# Altium PCB RE.-SYS-final.PcbDoc
Units mm, origin at the board's own origin, x right, y up, seen from the top; angles counter-clockwise.
Board outline 137.54 x 69.6 mm, 2 copper layers (Top Layer, Bottom Layer); 50 components, 40 nets, 282 pads, 0 vias.
Unrouted connection lines stored in the file: 1.
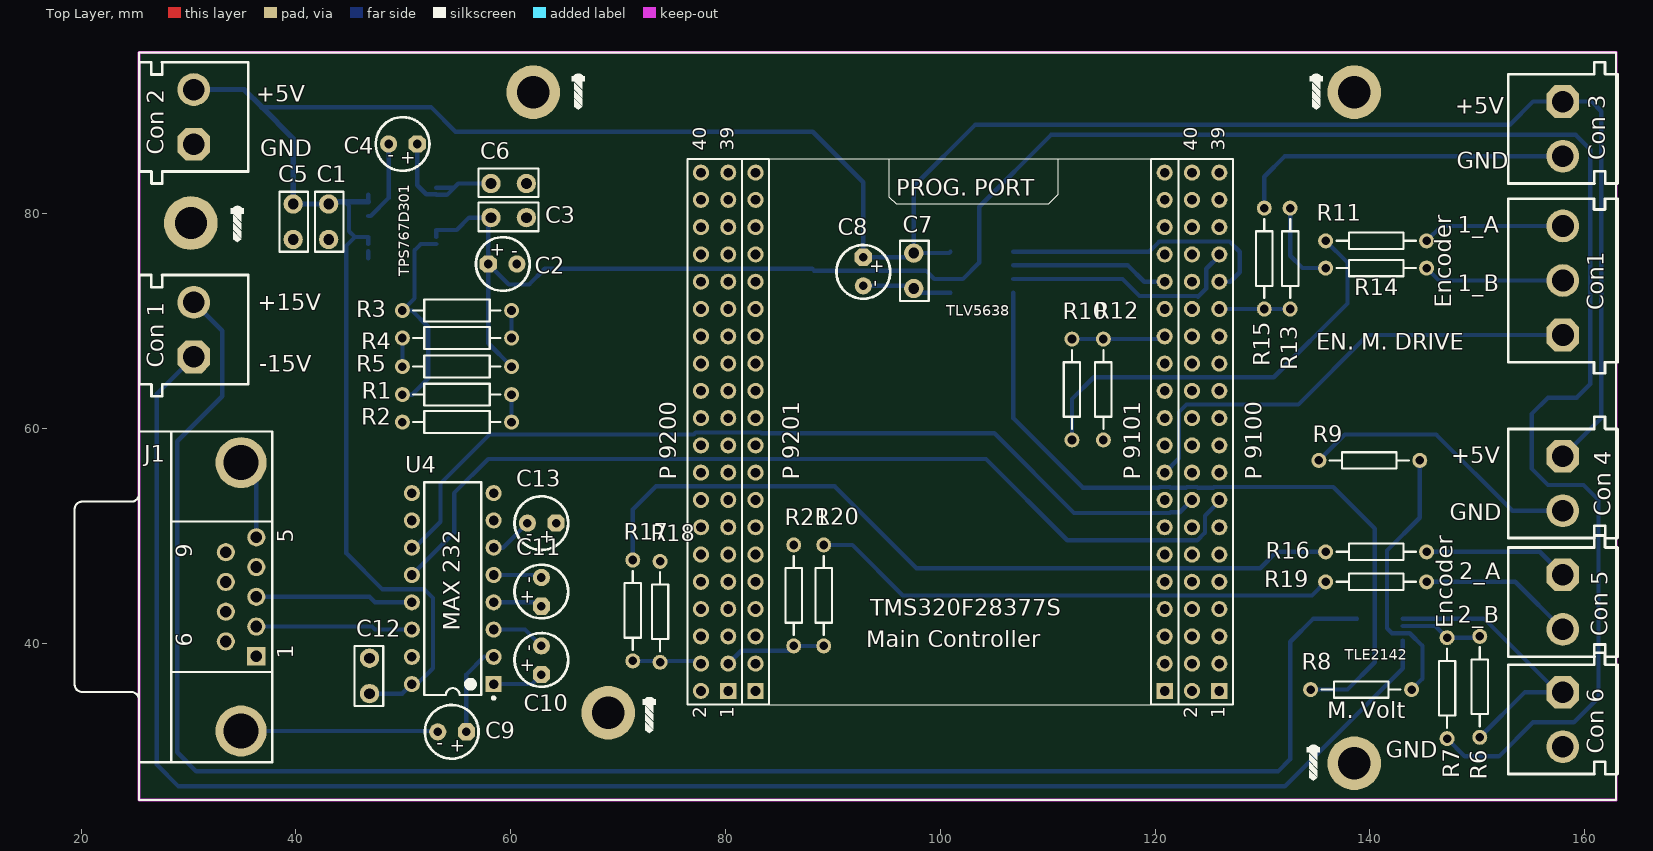
[diagram p0: Top Layer view]
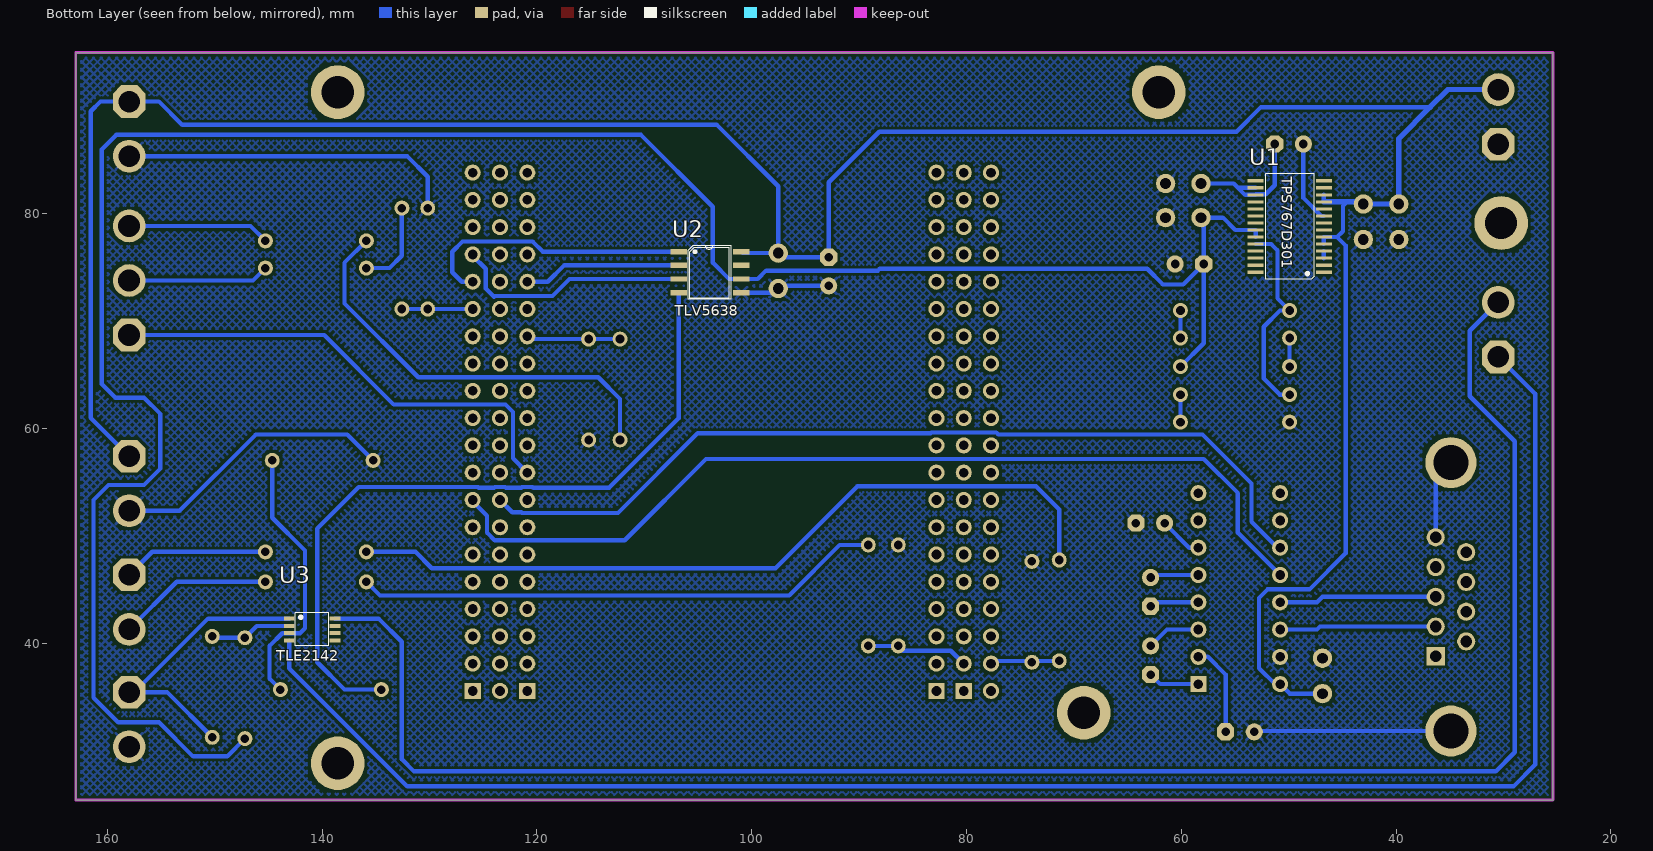
[diagram p1: Bottom Layer view, seen from below]
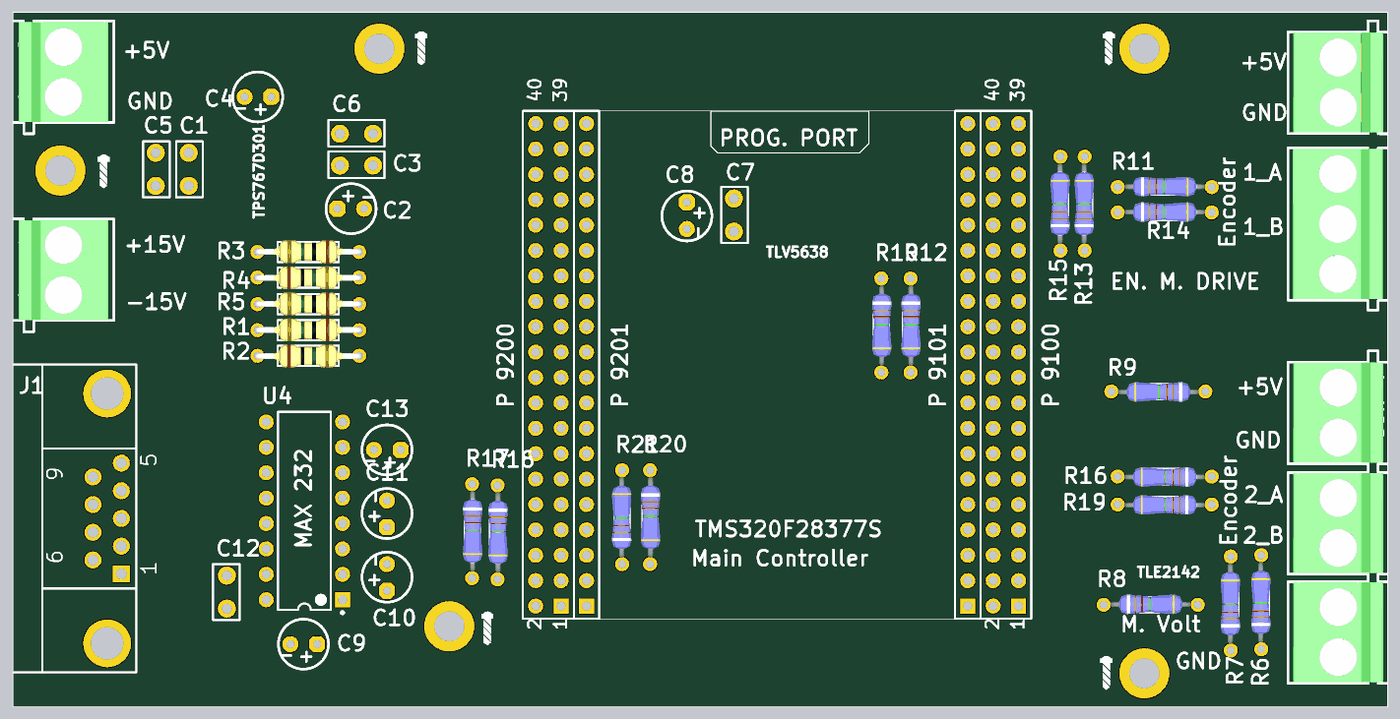
[diagram p2: 3D render of the assembled board from above, using the file's embedded part models]

## Layer stack, top to bottom
Top Layer: signal copper 0.0356
Dielectric: dielectric 0.32, FR-4, Dk 4.8
Bottom Layer: signal copper 0.0356

## Board outline
25.4,25.4 25.4,94.996 162.941,94.996 162.941,25.4

## Design rules (kind name [scope] priority, off if disabled: settings)
Clearance [All] p1: gap=0.25
PolygonConnect [All] p1: connectstyle=Relief reliefconductorwidth=0.254 reliefentries=4 polygonreliefangle="45 Angle" airgapwidth=0.254
RoutingLayers [All] p1: top layer_v5=FALSE bottom layer_v5=TRUE
RoutingVias [All] p1: holewidth=0.711 width=1.27 viastyle="Through Hole" minholewidth=0.711 minwidth=1.27 maxholewidth=0.711 maxwidth=1.27
SolderMaskExpansion [All] p1: expansion=0.102
Width [All] p1: maxlimit=1 minlimit=0.254 preferedwidth=0.254
27 further rules are at their usual default settings.

## Components (designator, comment, footprint, x,y, rotation, side; value= is the part's Value field where it differs from the comment)
C1 "Cap" RAD-0.3 43.053,79.248 r90 top
C2 "Cap" MY_CAP3300U 59.309,75.311 r0 top
C3 "Cap" RAD-0.3 59.817,79.629 r180 top
C4 "Cap" MY_CAP3300U 49.911,86.487 r180 top
C5 "Cap" RAD-0.3 39.751,79.248 r90 top
C6 "Cap" RAD-0.3 59.817,82.804 r180 top
C7 "Cap" RAD-0.3 97.536,74.676 r90 top
C8 "Cap" MY_CAP3300U 92.837,74.549 r270 top
C9 "Cap" MY_CAP3300U 54.483,31.75 r180 top
C10 "Cap" MY_CAP3300U 62.865,38.481 r90 top
C11 "Cap" MY_CAP3300U 62.865,44.846 r90 top
C12 "Cap" RAD-0.3 46.863,36.957 r270 top
C13 "Cap" MY_CAP3300U 62.834,51.181 r180 top
Con1 "CON3 pin Green" My_CN3 152.883,66.167 r90 top
"Con 1" "CON2 pin blue" MY_CN2 25.4,64.135 r90 top
"Con 2" "CON2 pin blue" MY_CN2 25.4,83.947 r90 top
"Con 3" "CON2 pin blue" MY_CN2 163.068,92.964 r270 top
"Con 4" "CON2 pin blue" MY_CN2 163.068,59.944 r270 top
"Con 5" "CON2 pin blue" MY_CN2 163.068,48.895 r270 top
"Con 6" "CON2 pin blue" MY_CN2 163.068,37.973 r270 top
J1 "D Connector 9" DSUB1.385-2H9 25.4,44.323 r90 top
"P 9100" "Header 20X2" HDR2X20 125.984,35.56 r90 top
"P 9101" "Header 20" HDR1X20 120.904,35.56 r90 top
"P 9200" "Header 20X2" HDR2X20 80.264,35.56 r90 top
"P 9201" "Header 20" HDR1X20 82.804,35.56 r90 top
R1 "1k" MY_AXIAL-0.4 55.016,63.163 r0 top
R2 "1k" MY_AXIAL-0.4 54.991,60.579 r180 top
R3 "1k" MY_AXIAL-0.4 55.016,70.993 r0 top
R4 "1k" MY_AXIAL-0.4 54.991,68.409 r180 top
R5 "1k" MY_AXIAL-0.4 55.016,65.773 r0 top
R6 "Res1" AXIAL-0.3 150.241,35.941 r270 top
R7 "Res1" AXIAL-0.3 147.193,35.814 r270 top
R8 "Res1" AXIAL-0.3 139.192,35.687 r180 top
R9 "Res1" AXIAL-0.3 139.954,57.023 r0 top
R10 "Res1" AXIAL-0.3 112.268,63.627 r90 top
R11 "Res1" AXIAL-0.3 140.589,77.47 r180 top
R12 "Res1" AXIAL-0.3 115.189,63.627 r90 top
R13 "Res1" AXIAL-0.3 132.588,75.819 r270 top
R14 "Res1" AXIAL-0.3 140.589,74.93 r180 top
R15 "Res1" AXIAL-0.3 130.175,75.819 r270 top
R16 "Res1" AXIAL-0.3 140.589,48.514 r0 top
R17 "Res1" AXIAL-0.3 71.374,43.053 r90 top
R18 "Res1" AXIAL-0.3 73.914,42.926 r90 top
R19 "Res1" AXIAL-0.3 140.589,45.72 r0 top
R20 "Res1" AXIAL-0.3 89.154,44.45 r90 top
R21 "Res1" AXIAL-0.3 86.36,44.45 r270 top
U1 "TPS767D301" "SMD Reg." 47.625,83.693 r0 bottom
U2 "TLV5638" "SMD IC FP" 105.918,72.009 r180 bottom
U3 "Op-Amp" PCBComponent_1 142.494,39.751 r180 bottom
U4 "MAX232CPE" PE16A 54.61,45.085 r180 top

## Footprints (in the part's own frame and the unit in brackets; to place one, negate y for a bottom-side part, rotate by r counter-clockwise, add the part's x,y. Pads: shape width x height; smd on the part's side, far side on the other; paste and mask are expansions set on the pad)
AXIAL-0.3 [mm]
  round 1.4 hole 0.8: 1(-4.699,0) 2(4.699,0)
  silkscreen extent -3.68,-0.76 3.68,0.76, body extent -4.06,-1.02 4.06,0.93, height 2.51
DSUB1.385-2H9 [mm] "Connector; D Subminiature; 9 Position; Right Angle; Pitch 1.385 mm"
  rect 1.69x1.69 hole 1.09: 1(-5.54,-10.92)
  round 1.69 hole 1.09: 2(-2.77,-10.92) 3(0,-10.92) 4(2.77,-10.92) 5(5.54,-10.92) 6(-4.155,-8.08) 7(-1.385,-8.08) 8(1.385,-8.08) 9(4.155,-8.08)
  round 4.76 hole 3.26: 10(-12.495,-9.5) 11(12.495,-9.5)
  silkscreen extent -15.4,-12.4 15.4,6
HDR1X20 [mm] "Connector; Header; 20 Position"
  rect 1.5x1.5 hole 0.9: 1(0,0)
  round 1.5 hole 0.9: 2(2.54,0) 3(5.08,0) 4(7.62,0) 5(10.16,0) 6(12.7,0) 7(15.24,0) 8(17.78,0) 9(20.32,0) 10(22.86,0) 11(25.4,0) 12(27.94,0) 13(30.48,0) 14(33.02,0) 15(35.56,0) 16(38.1,0) 17(40.64,0) 18(43.18,0) 19(45.72,0) 20(48.26,0)
  silkscreen extent -1.27,-1.27 49.53,1.27
HDR2X20 [mm] "Connector; Header; 20x2 Position"
  rect 1.5x1.5 hole 0.9: 1(0,0)
  round 1.5 hole 0.9: 2(0,2.54) 3(2.54,0) 4(2.54,2.54) 5(5.08,0) 6(5.08,2.54) 7(7.62,0) 8(7.62,2.54) 9(10.16,0) 10(10.16,2.54) 11(12.7,0) 12(12.7,2.54) 13(15.24,0) 14(15.24,2.54) 15(17.78,0) 16(17.78,2.54) 17(20.32,0) 18(20.32,2.54) 19(22.86,0) 20(22.86,2.54) 21(25.4,0) 22(25.4,2.54) 23(27.94,0) 24(27.94,2.54) 25(30.48,0) 26(30.48,2.54) 27(33.02,0) 28(33.02,2.54) 29(35.56,0) 30(35.56,2.54) 31(38.1,0) 32(38.1,2.54) 33(40.64,0) 34(40.64,2.54) 35(43.18,0) 36(43.18,2.54) 37(45.72,0) 38(45.72,2.54) 39(48.26,0) 40(48.26,2.54)
  silkscreen extent -1.27,-1.27 49.53,3.81
MY_AXIAL-0.4 [mm]
  round 1.4 hole 0.8: 1(-5.093,-0.013) 2(5.067,-0.013)
  silkscreen extent -4.08,-1.03 4.05,1, body extent -5.38,-1.14 5.38,1.17, height 2.93
MY_CAP3300U [mm]
  oct 1.6x1.6 hole 0.8: +(-1.397,0)
  round 1.6 hole 0.8: -(1.27,0)
  silkscreen extent -2.53,-2.5 2.47,2.5
MY_CN2 [mil]
  oct 120x120 hole 78.74: 1(99.5,-200.5)
  round 120 hole 78.74: 2(299.5,-200.5)
  silkscreen extent -45,-400 400,0, body extent 1,-379 395,-25, height 534
My_CN3 [mil]
  oct 120x120 hole 80: 1(99.5,-200.5)
  round 120 hole 80: 2(299.5,-200.5) 3(499.5,-200.5)
  silkscreen extent -40,-400 600,0, body extent 5,-374 595,-20, height 534
PCBComponent_1 [mm]
  rect 1x0.38 smd: 1(-0.584,2.54) 2(-0.584,1.863) 3(-0.584,1.185) 4(-0.584,0.508) 5(3.683,0.508) 6(3.683,1.185) 7(3.683,1.863) 8(3.683,2.54)
  silkscreen extent 0,0 3.1,3.1
PE16A [mm] "DIP, 16-Leads, Row Spacing 7.62mm, Pitch 2.54mm, Body 19.18x6.99mm"
  rect 1.5x1.5 hole 0.9: 1(-3.81,8.89)
  round 1.5 hole 0.9: 2(-3.81,6.35) 3(-3.81,3.81) 4(-3.81,1.27) 5(-3.81,-1.27) 6(-3.81,-3.81) 7(-3.81,-6.35) 8(-3.81,-8.89) 9(3.81,-8.89) 10(3.81,-6.35) 11(3.81,-3.81) 12(3.81,-1.27) 13(3.81,1.27) 14(3.81,3.81) 15(3.81,6.35) 16(3.81,8.89)
  silkscreen extent -3.94,-9.9 2.65,10.31, body extent -3.3,-9.9 3.3,9.9, height 5.08
RAD-0.3 [mm]
  round 1.8 hole 1: 1(-1.651,0) 2(1.651,0)
  silkscreen extent -2.79,-1.4 2.79,1.27
"SMD IC FP" [mil]
  rect 60x20.08 smd: 1(-35,175) 2(-35,125) 3(-35,75) 4(-35,25) 5(195,25) 6(195,75) 7(195,125) 8(195,175)
  silkscreen extent 0,0 157,197
"SMD Reg." [mm]
  rect 1.5x0.3 smd: 1(-0.889,9.144) 2(-0.889,8.489) 3(-0.889,7.835) 4(-0.889,7.18) 5(-0.889,6.526) 6(-0.889,5.871) 7(-0.889,5.217) 8(-0.889,4.562) 9(-0.889,3.908) 10(-0.889,3.253) 11(-0.889,2.599) 12(-0.889,1.944) 13(-0.889,1.29) 14(-0.889,0.635) 15(5.461,0.635) 16(5.461,1.29) 17(5.461,1.29) 18(5.461,1.944) 19(5.461,2.599) 20(5.461,3.253) 21(5.461,3.908) 22(5.461,4.562) 23(5.461,5.217) 24(5.461,5.871) 25(5.461,6.526) 26(5.461,7.18) 27(5.461,7.18) 28(5.461,7.835) 29(5.461,8.489) 30(5.461,9.144)
  silkscreen extent 0,0 4.5,9.8

## Part data
C1 C3 C5 C6 C7 C12: "Capacitor"
C2 C4 C8 C9 C10 C11 C13: library part "Cap Pol", "CAP-3300Uf"
Con1: "Connector green screw"
"Con 1" "Con 2" "Con 3" "Con 4" "Con 5" "Con 6": "Connector blue screw"
J1: "Receptacle Assembly, 9 Position, Right Angle"
"P 9100" "P 9200": "Header, 20-Pin, Dual row"
"P 9101" "P 9201": "Header, 20-Pin"
R1 R2 R3 R4 R5: library part Res, "resistor 1/4 wat"
R6 R7 R8 R9 R10 R11 R12 R13 R14 R15 R16 R17 R18 R19 R20 R21: "Resistor"
U1: library part "SMD Reg.", "Power Reg SMD IC"
U2: library part "SMD IC", "DAC"
U3: library part SMD_Comp., "OP-AMP"
U4: "+5V Powered RS-232 Driver/Receiver"

## Free pads (board coordinates)
  round 5 hole 3: 0(30.226,79.121) 1(30.226,79.121) 2(138.557,28.829) 3(138.557,91.313) 4(69.088,33.528) 5(62.103,91.313)

## Nets (pads, with @x,y where several pads share a name; then routed paths per layer and width w, separated by ;. In a path a pad name is that pad's centre, name@x,y a point inside that pad or via, vN(x,y) a via of type N, cw(c..) or ccw(c..) an arc to the next point about the centre after c; other vN are vias at no path point)
"ENABLE MOTOR DRIVER": "P 9101.9" Con1.1 | length 44.9
  Bottom Layer w0.4: 120.904,55.88 122.24,57.216 122.24,61.534 122.936,62.23 133.35,62.23 139.814,68.694 Con1.1
"ENCODER 1A": Con1.3 R11.1 | length 13.3
  Bottom Layer w0.4: R11.1 146.672,78.854 Con1.3
"ENCODER 1B": Con1.2 R14.1 | length 13.2
  Bottom Layer w0.4: R14.1 146.444,73.774 Con1.2
"ENCODER 2A": "Con 5.1" R16.2 | length 13.6
  Bottom Layer w0.4: R16.2 155.829,48.514 157.975,46.368
"ENCODER 2B": "Con 5.2" R19.2 | length 14.5
  Bottom Layer w0.4: R19.2 153.543,45.72 157.975,41.288
GND: "Con 2.1" "Con 3.2" "Con 4.2" "Con 6.2" C1.1 C2.- C3.1 C4.- C5.1 C6.1 C7.1 C8.- C9.- C12.1 C13.+ J1.5 J1.10 J1.11 R2.2 R9.1 R12.1 R15.1 R18.2 R21.1 U1.3 U1.4 U1.9 U1.10 U2.5 U4.15 | length 100.7
  Bottom Layer w0.4: J1.10 53.135,31.828 C9.- ; J1.11 36.32,55.398 J1.5 ; U1.3 U1.4 ; U1.9 46.969,79.785 48.641,81.457 C4.- ; C8.- 97.282,73.279 C7.1 97.917,72.644 U2.5 ; R15.1 130.175,83.439 132.093,85.357 157.975,85.357 ; R9.1 137.668,59.436 146.177,59.436 153.276,52.337 157.975,52.337
"MOTOR VOLTAGE": "Con 6.1" R6.2 U3.1 | length 26.7
  Bottom Layer w0.4: U3.1 150.622,42.291 157.467,35.446 ; R6.2 154.445,35.446 157.467,35.446 ; 157.975,35.446 157.467,35.446
NetC4_+: C4.+ C6.2 U1.17 U1.18 | length 13.1
  Bottom Layer w0.4: C4.+ 51.308,82.639 52.148,81.799 U1.18@53.086,81.799 ; U1.18 54.063,81.749 54.717,82.403 ; U1.17 54.717,82.403 ; C6.2 55.118,82.804 54.717,82.403
NetC9_+: C9.+ U4.2 | length 8.6
  Bottom Layer w0.4: C9.+ 55.88,37.084 57.531,38.735 U4.2
NetC10_+: C10.+ U4.1 | length 4.8
  Bottom Layer w0.4: U4.1 61.976,36.195 C10.+
NetC10_-: C10.- U4.3 | length 5.1
  Bottom Layer w0.4: U4.3 61.341,41.275 C10.-
NetC11_+: C11.+ U4.4 | length 4.6
  Bottom Layer w0.4: U4.4 62.499,43.815 C11.+
NetC11_-: C11.- U4.5 | length 4.5
  Bottom Layer w0.4: U4.5 62.626,46.355 C11.-
NetC13_-: C13.- U4.6 | length 4.1
  Bottom Layer w0.4: U4.6 59.278,48.895 C13.-
NetJ1_2: J1.2 U4.14 | length 14.6
  Bottom Layer w0.4: J1.2 47.093,41.553 47.371,41.275 U4.14
NetJ1_3: J1.3 U4.13 | length 14.7
  Bottom Layer w0.4: J1.3 46.863,44.323 47.371,43.815 U4.13
"NetP 9100_15": "P 9100.15" U4.12 | length 87.5
  Bottom Layer w0.4: U4.12 54.737,50.292 54.737,53.975 57.912,57.15 104.267,57.15 111.821,49.596 123.943,49.596 124.648,50.301 124.648,51.872 125.984,53.208 125.984,53.34
"NetP 9100_16": "P 9100.16" U4.11 | length 82.8
  Bottom Layer w0.4: U4.11 51.054,48.895 53.467,51.308 53.467,54.864 58.041,59.438 77.039,59.438 77.225,59.624 83.303,59.624 83.364,59.563 105.029,59.563 112.456,52.136 121.403,52.136 121.464,52.197 122.301,52.197 123.444,53.34
"NetP 9100_29": "P 9100.29" R13.2 R15.2 | length 6.6
  Bottom Layer w0.4: 125.984,71.12 R15.2 R13.2
"NetP 9100_31": "P 9100.31" U2.1 | length 26
  Bottom Layer w0.4: U2.1 119.455,76.454 120.405,77.404 126.934,77.404 127.889,76.449 127.889,74.549 127,73.66 125.984,73.66
"NetP 9100_33": "P 9100.33" U2.3 | length 22.6
  Bottom Layer w0.4: U2.3 116.967,73.914 118.557,72.324 123.943,72.324 124.004,72.263 124.78,73.039 124.78,74.864 125.984,76.068 125.984,76.2
"NetP 9101_14": "P 9101.14" R10.2 R12.2 | length 8.7
  Bottom Layer w0.4: R10.2 R12.2 120.65,68.326 120.904,68.58
"NetP 9101_16": "P 9101.16" U2.2 | length 14.7
  Bottom Layer w0.4: U2.2 117.475,75.184 118.999,73.66 120.904,73.66
"NetP 9200_3": "P 9200.3" R20.1 R21.2 | length 9.6
  Bottom Layer w0.4: 80.264,38.1 81.468,39.304 85.913,39.304 R21.2 R20.1
"NetP 9200_4": "P 9200.4" R17.1 R18.1 | length 6.5
  Bottom Layer w0.4: R17.1 77.47,38.354 77.724,38.1
NetR1_1: R1.1 R3.1 U1.25 | length 19.2
  Bottom Layer w0.4: R1.1 50.832,63.151 52.324,64.643 52.324,69.469 50.813,70.98 R3.1 51.054,72.111 51.054,76.581 51.64,77.167 U1.25
NetR1_2: R1.2 R2.1 | length 2.6
  Bottom Layer w0.4: R2.1 R1.2
NetR3_2: R3.2 R4.1 | length 2.6
  Bottom Layer w0.4: R4.1 R3.2
NetR4_2: R4.2 R5.1 | length 2.7
  Bottom Layer w0.4: R5.1 R4.2
NetR6_1: R6.1 R7.1 U3.2 | length 7.7
  Bottom Layer w0.4: U3.2 146.092,41.614 R7.1 150.114,40.513 R6.1
NetR8_1: R8.1 R9.2 U3.3 | length 25.4
  Bottom Layer w0.4: R8.1 144.907,36.703 144.907,39.757 143.727,40.936 U3.3 142.071,40.936 141.605,41.402 141.605,48.641 144.653,51.689 R9.2
NetR8_2: R8.2 U2.4 | length 69.2
  Bottom Layer w0.4: U2.4 106.807,60.96 113.284,54.483 120.344,54.483 120.405,54.544 121.403,54.544 121.464,54.483 122.884,54.483 122.945,54.544 123.943,54.544 124.004,54.483 125.424,54.483 125.485,54.544 136.591,54.544 140.462,50.673 140.462,38.227 137.922,35.687 R8.2
NetR10_1: R10.1 R11.2 | length 39.8
  Bottom Layer w0.4: R10.1 112.268,62.738 114.3,64.77 131.064,64.77 137.922,71.628 137.922,75.438 R11.2
NetR13_1: R13.1 R14.2 | length 8.2
  Bottom Layer w0.4: R13.1 132.588,76.073 133.731,74.93 R14.2
NetR16_1: R16.1 R17.2 | length 73.9
  Bottom Layer w0.4: R17.2 71.374,52.451 73.533,54.61 90.17,54.61 97.79,46.99 129.794,46.99 131.318,48.514 R16.1
NetR19_1: R19.1 R20.2 | length 49.2
  Bottom Layer w0.4: R20.2 91.821,49.149 96.52,44.45 134.62,44.45 R19.1
"VCC +1.9 V": C2.+ C3.2 R5.2 R7.2 U1.23 U1.24 U2.6 | length 211.1
  Bottom Layer w0.4: U1.24 U1.23 53.096,78.486 54.991,78.486 56.134,79.629 C3.2 57.912,79.375 C2.+ ; R5.2 57.912,67.932 C2.+ ; R7.2 148.844,29.464 152.019,29.464 155.194,32.639 159.004,32.639 161.29,34.925 161.29,53.34 159.893,54.737 156.591,54.737 155.067,56.261 155.067,61.341 156.591,62.865 159.258,62.865 160.528,64.135 160.528,85.979 159.172,87.335 110.322,87.335 103.632,80.645 103.632,75.438 102.108,73.914 U2.6 99.441,73.914 98.663,74.692 88.249,74.692 88.077,74.864 63.18,74.864 61.722,73.406 59.817,73.406 C2.+
"VCC +5 V": "Con 2.2" "Con 3.1" "Con 4.1" C1.2 C5.2 C7.2 C8.+ C12.2 U1.5 U1.6 U1.11 U1.12 U2.8 U4.16 | length 264.9
  Bottom Layer w0.4: 36.83,89.916 52.578,89.916 54.864,87.63 88.138,87.63 92.837,82.931 C8.+ 97.155,75.946 C7.2 ; 44.577,81.094 44.958,80.713 44.958,78.359 45.495,77.822 ; U1.5 U1.6 45.495,77.822 ; U1.11 U1.12 ; C12.2 49.911,35.306 U4.16 51.282,36.195 52.766,37.679 52.766,44.221 51.972,45.015 48.076,45.015 44.704,48.387 44.704,77.03 45.495,77.822 ; U2.8 100.838,76.327 C7.2 ; 157.975,57.417 161.544,60.985 161.544,89.535 160.642,90.437 157.975,90.437 155.207,90.437 153.035,88.265 103.251,88.265 97.536,82.55 C7.2
  Bottom Layer w0.5: 30.493,91.554 35.192,91.554 36.83,89.916 39.751,86.995 C5.2 C1.2 ; C1.2@43.248,81.094 44.577,81.094 U1.11
"VCC +15 V": "Con 1.2" U3.8 | length 167.6
  Bottom Layer w0.4: 30.493,71.742 33.147,69.088 33.147,62.992 28.956,58.801 28.956,29.845 30.734,28.067 131.445,28.067 132.588,29.21 132.588,40.132 134.747,42.291 U3.8
"VEE -15 V": "Con 1.1" U3.4 | length 163.4
  Bottom Layer w0.4: 30.493,66.662 27.051,63.221 27.051,28.702 29.083,26.67 132.08,26.67 143.078,37.668 U3.4
pads on no net: "P 9100.1" "P 9100.2" "P 9100.3" "P 9100.4" "P 9100.5" "P 9100.6" "P 9100.7" "P 9100.8" "P 9100.9" "P 9100.10" "P 9100.11" "P 9100.12" "P 9100.13" "P 9100.14" "P 9100.17" "P 9100.18" "P 9100.19" "P 9100.20" "P 9100.21" "P 9100.22" "P 9100.23" "P 9100.24" "P 9100.25" "P 9100.26" "P 9100.27" "P 9100.28" "P 9100.30" "P 9100.32" "P 9100.34" "P 9100.35" "P 9100.36" "P 9100.37" "P 9100.38" "P 9100.39" "P 9100.40" "P 9101.1" "P 9101.2" "P 9101.3" "P 9101.4" "P 9101.5" "P 9101.6" "P 9101.7" "P 9101.8" "P 9101.10" "P 9101.11" "P 9101.12" "P 9101.13" "P 9101.15" "P 9101.17" "P 9101.18" "P 9101.19" "P 9101.20" "P 9200.1" "P 9200.2" "P 9200.5" "P 9200.6" "P 9200.7" "P 9200.8" "P 9200.9" "P 9200.10" "P 9200.11" "P 9200.12" "P 9200.13" "P 9200.14" "P 9200.15" "P 9200.16" "P 9200.17" "P 9200.18" "P 9200.19" "P 9200.20" "P 9200.21" "P 9200.22" "P 9200.23" "P 9200.24" "P 9200.25" "P 9200.26" "P 9200.27" "P 9200.28" "P 9200.29" "P 9200.30" "P 9200.31" "P 9200.32" "P 9200.33" "P 9200.34" "P 9200.35" "P 9200.36" "P 9200.37" "P 9200.38" "P 9200.39" "P 9200.40" "P 9201.1" "P 9201.2" "P 9201.3" "P 9201.4" "P 9201.5" "P 9201.6" "P 9201.7" "P 9201.8" "P 9201.9" "P 9201.10" "P 9201.11" "P 9201.12" "P 9201.13" "P 9201.14" "P 9201.15" "P 9201.16" "P 9201.17" "P 9201.18" "P 9201.19" "P 9201.20" J1.1 J1.4 J1.6 J1.7 J1.8 J1.9 U1.1 U1.2 U1.7 U1.8 U1.13 U1.14 U1.15 U1.16 U1.19 U1.20 U1.21 U1.22 U1.26 U1.27 U1.28 U1.29 U1.30 U2.7 U3.5 U3.6 U3.7 U4.7 U4.8 U4.9 U4.10

## Polygon pours and split planes (outlines as drawn)
GND on Bottom Layer "Bottom Layer-No Net" (hatched 45Degree grid 0.508 track 0.203, remove dead copper, pour order 2): 25.4,94.996 162.941,94.996 162.941,25.4 25.4,25.4

## Keep-outs
Keep-Out Layer:
  the board outline again, w0.254

## Silkscreen, mask and mechanical layers (free items; w line width, h text height)
Top Overlay:
  region: 135.611,92.329 134.391,92.329 134.391,92.812 135.611,92.812
  region: 135.001,89.662 135.382,89.941 134.62,90.678 134.62,89.941
  region: 135.382,91.567 135.382,92.456 134.62,92.456 134.62,92.329
  region: 135.382,90.805 135.382,91.44 134.62,92.202 134.62,91.567
  region: 135.382,90.043 135.382,90.678 134.62,91.44 134.62,90.805
  region: 135.357,29.845 134.137,29.845 134.137,30.328 135.357,30.328
  region: 134.747,27.178 135.128,27.457 134.366,28.194 134.366,27.457
  region: 135.128,29.083 135.128,29.972 134.366,29.972 134.366,29.845
  region: 135.128,28.321 135.128,28.956 134.366,29.718 134.366,29.083
  region: 135.128,27.559 135.128,28.194 134.366,28.956 134.366,28.321
  region: 73.508,34.29 72.288,34.29 72.288,34.773 73.508,34.773
  region: 72.898,31.623 73.279,31.902 72.517,32.639 72.517,31.902
  region: 73.279,33.528 73.279,34.417 72.517,34.417 72.517,34.29
  region: 73.279,32.766 73.279,33.401 72.517,34.163 72.517,33.528
  region: 73.279,32.004 73.279,32.639 72.517,33.401 72.517,32.766
  region: 66.904,92.329 65.684,92.329 65.684,92.812 66.904,92.812
  region: 66.294,89.662 66.675,89.941 65.913,90.678 65.913,89.941
  region: 66.675,91.567 66.675,92.456 65.913,92.456 65.913,92.329
  region: 66.675,90.805 66.675,91.44 65.913,92.202 65.913,91.567
  region: 66.675,90.043 66.675,90.678 65.913,91.44 65.913,90.805
  region: 35.154,80.01 33.934,80.01 33.934,80.493 35.154,80.493
  region: 34.544,77.343 34.925,77.622 34.163,78.359 34.163,77.622
  region: 34.925,79.248 34.925,80.137 34.163,80.137 34.163,80.01
  region: 34.925,78.486 34.925,79.121 34.163,79.883 34.163,79.248
  region: 34.925,77.724 34.925,78.359 34.163,79.121 34.163,78.486
  lines w0.05: 76.454,34.29 127.254,34.29 127.254,85.09 76.454,85.09 76.454,34.29
  lines w0.1: 95.25,81.534 95.25,85.09 110.998,85.09 110.998,81.793 110.104,80.899 95.885,80.899 95.25,81.534
  lines w0.2: 25.4,25.4 25.4,94.996 162.941,94.996 162.941,25.4 25.4,25.4
  lines w0.254: 34.117,80.22 cw(c34.559,80.166) 35.001,80.213 ; 65.867,92.539 cw(c66.309,92.485) 66.751,92.532 ; 72.471,34.5 cw(c72.913,34.446) 73.355,34.493 ; 134.32,30.055 cw(c134.762,30.001) 135.204,30.048 ; 134.574,92.539 cw(c135.016,92.485) 135.458,92.532
  text "+5V" at 36.322,90.424 h1.52
  text "+5V" at 147.955,89.281 h1.52
  text "GND" at 36.703,85.344 h1.52
  text "GND" at 148.082,84.201 h1.52
  text "PROG. PORT" at 95.885,81.661 h1.52
  text "1_A" at 148.209,78.232 h1.52
  text "TPS767D301" at 50.546,74.168 h1 r90
  text "1_B" at 148.209,72.771 h1.52
  text "Encoder" at 147.574,71.247 h1.52 r90
  text "+15V" at 36.449,70.993 h1.52
  text "TLV5638" at 100.584,70.485 h1
  text "EN. M. DRIVE" at 135.001,67.31 h1.52
  text "-15V" at 36.576,65.278 h1.52
  text "+5V" at 147.574,56.769 h1.52
  text "GND" at 147.447,51.435 h1.52
  text "2_A" at 148.336,45.974 h1.52
  text "TMS320F28377S" at 93.472,42.545 h1.52
  text "2_B" at 148.209,41.91 h1.52
  text "Encoder" at 147.701,41.402 h1.52 r90
  text "MAX 232" at 55.245,41.148 h1.52 r90
  text "Main Controller" at 93.091,39.624 h1.52
  text "TLE2142" at 137.668,38.481 h1
  text "M. Volt" at 136.017,33.02 h1.52
  text "GND" at 141.478,29.337 h1.52
Bottom Overlay:
  text "TPS767D301" at 50.673,83.439 h1 r90
  text "TLV5638" at 107.188,70.485 h1
  text "TLE2142" at 144.272,38.354 h1

## Dimensions
162.941,94.996 to 162.941,25.4 on Top Overlay
25.4,94.996 to 162.941,94.996 on Top Overlay

## Text inside footprints (layer, text, board x,y; h text height)
C2: Top Overlay "-" at 60.071,75.946 h1.27; Top Overlay "+" at 58.039,76.073 h1.27
C4: Top Overlay "+" at 51.181,85.725 h1.27 r180; Top Overlay "-" at 49.149,85.852 h1.27 r180
C8: Top Overlay "-" at 93.472,73.787 h1.27 r270; Top Overlay "+" at 93.599,75.819 h1.27 r270
C9: Top Overlay "+" at 55.753,30.988 h1.27 r180; Top Overlay "-" at 53.721,31.115 h1.27 r180
C10: Top Overlay "-" at 62.23,39.243 h1.27 r90; Top Overlay "+" at 62.103,37.211 h1.27 r90
C11: Top Overlay "+" at 62.103,43.576 h1.27 r90; Top Overlay "-" at 62.23,45.608 h1.27 r90
C13: Top Overlay "-" at 62.072,50.546 h1.27 r180; Top Overlay "+" at 64.104,50.419 h1.27 r180
J1: Top Overlay "6" at 30.375,39.668 h1.5 r90; Top Overlay "9" at 30.375,47.978 h1.5 r90; Top Overlay "5" at 39.775,49.363 h1.5 r90; Top Overlay "1" at 39.775,38.533 h1.5 r90
"P 9100": Top Overlay "1" at 126.492,33.02 h1.27 r90; Top Overlay "2" at 123.952,33.02 h1.27 r90; Top Overlay "40" at 123.952,85.852 h1.27 r90; Top Overlay "39" at 126.492,85.852 h1.27 r90
"P 9200": Top Overlay "1" at 80.772,33.02 h1.27 r90; Top Overlay "2" at 78.232,33.02 h1.27 r90; Top Overlay "40" at 78.232,85.852 h1.27 r90; Top Overlay "39" at 80.772,85.852 h1.27 r90